# Altium PCB Rackmount_DSP.PcbDoc (part 19 of 24)
Units mil, origin at the board's own origin, x right, y up, seen from the top; angles counter-clockwise.
Board outline 10629.92 x 8267.72 mil, 4 copper layers (Top Layer, Mid Layer 1, Mid Layer 2, Bottom Layer), stack 36.2 mil thick; 4500 components, 1565 nets, 9765 pads, 3289 vias.
Unrouted connection lines stored in the file: 1.
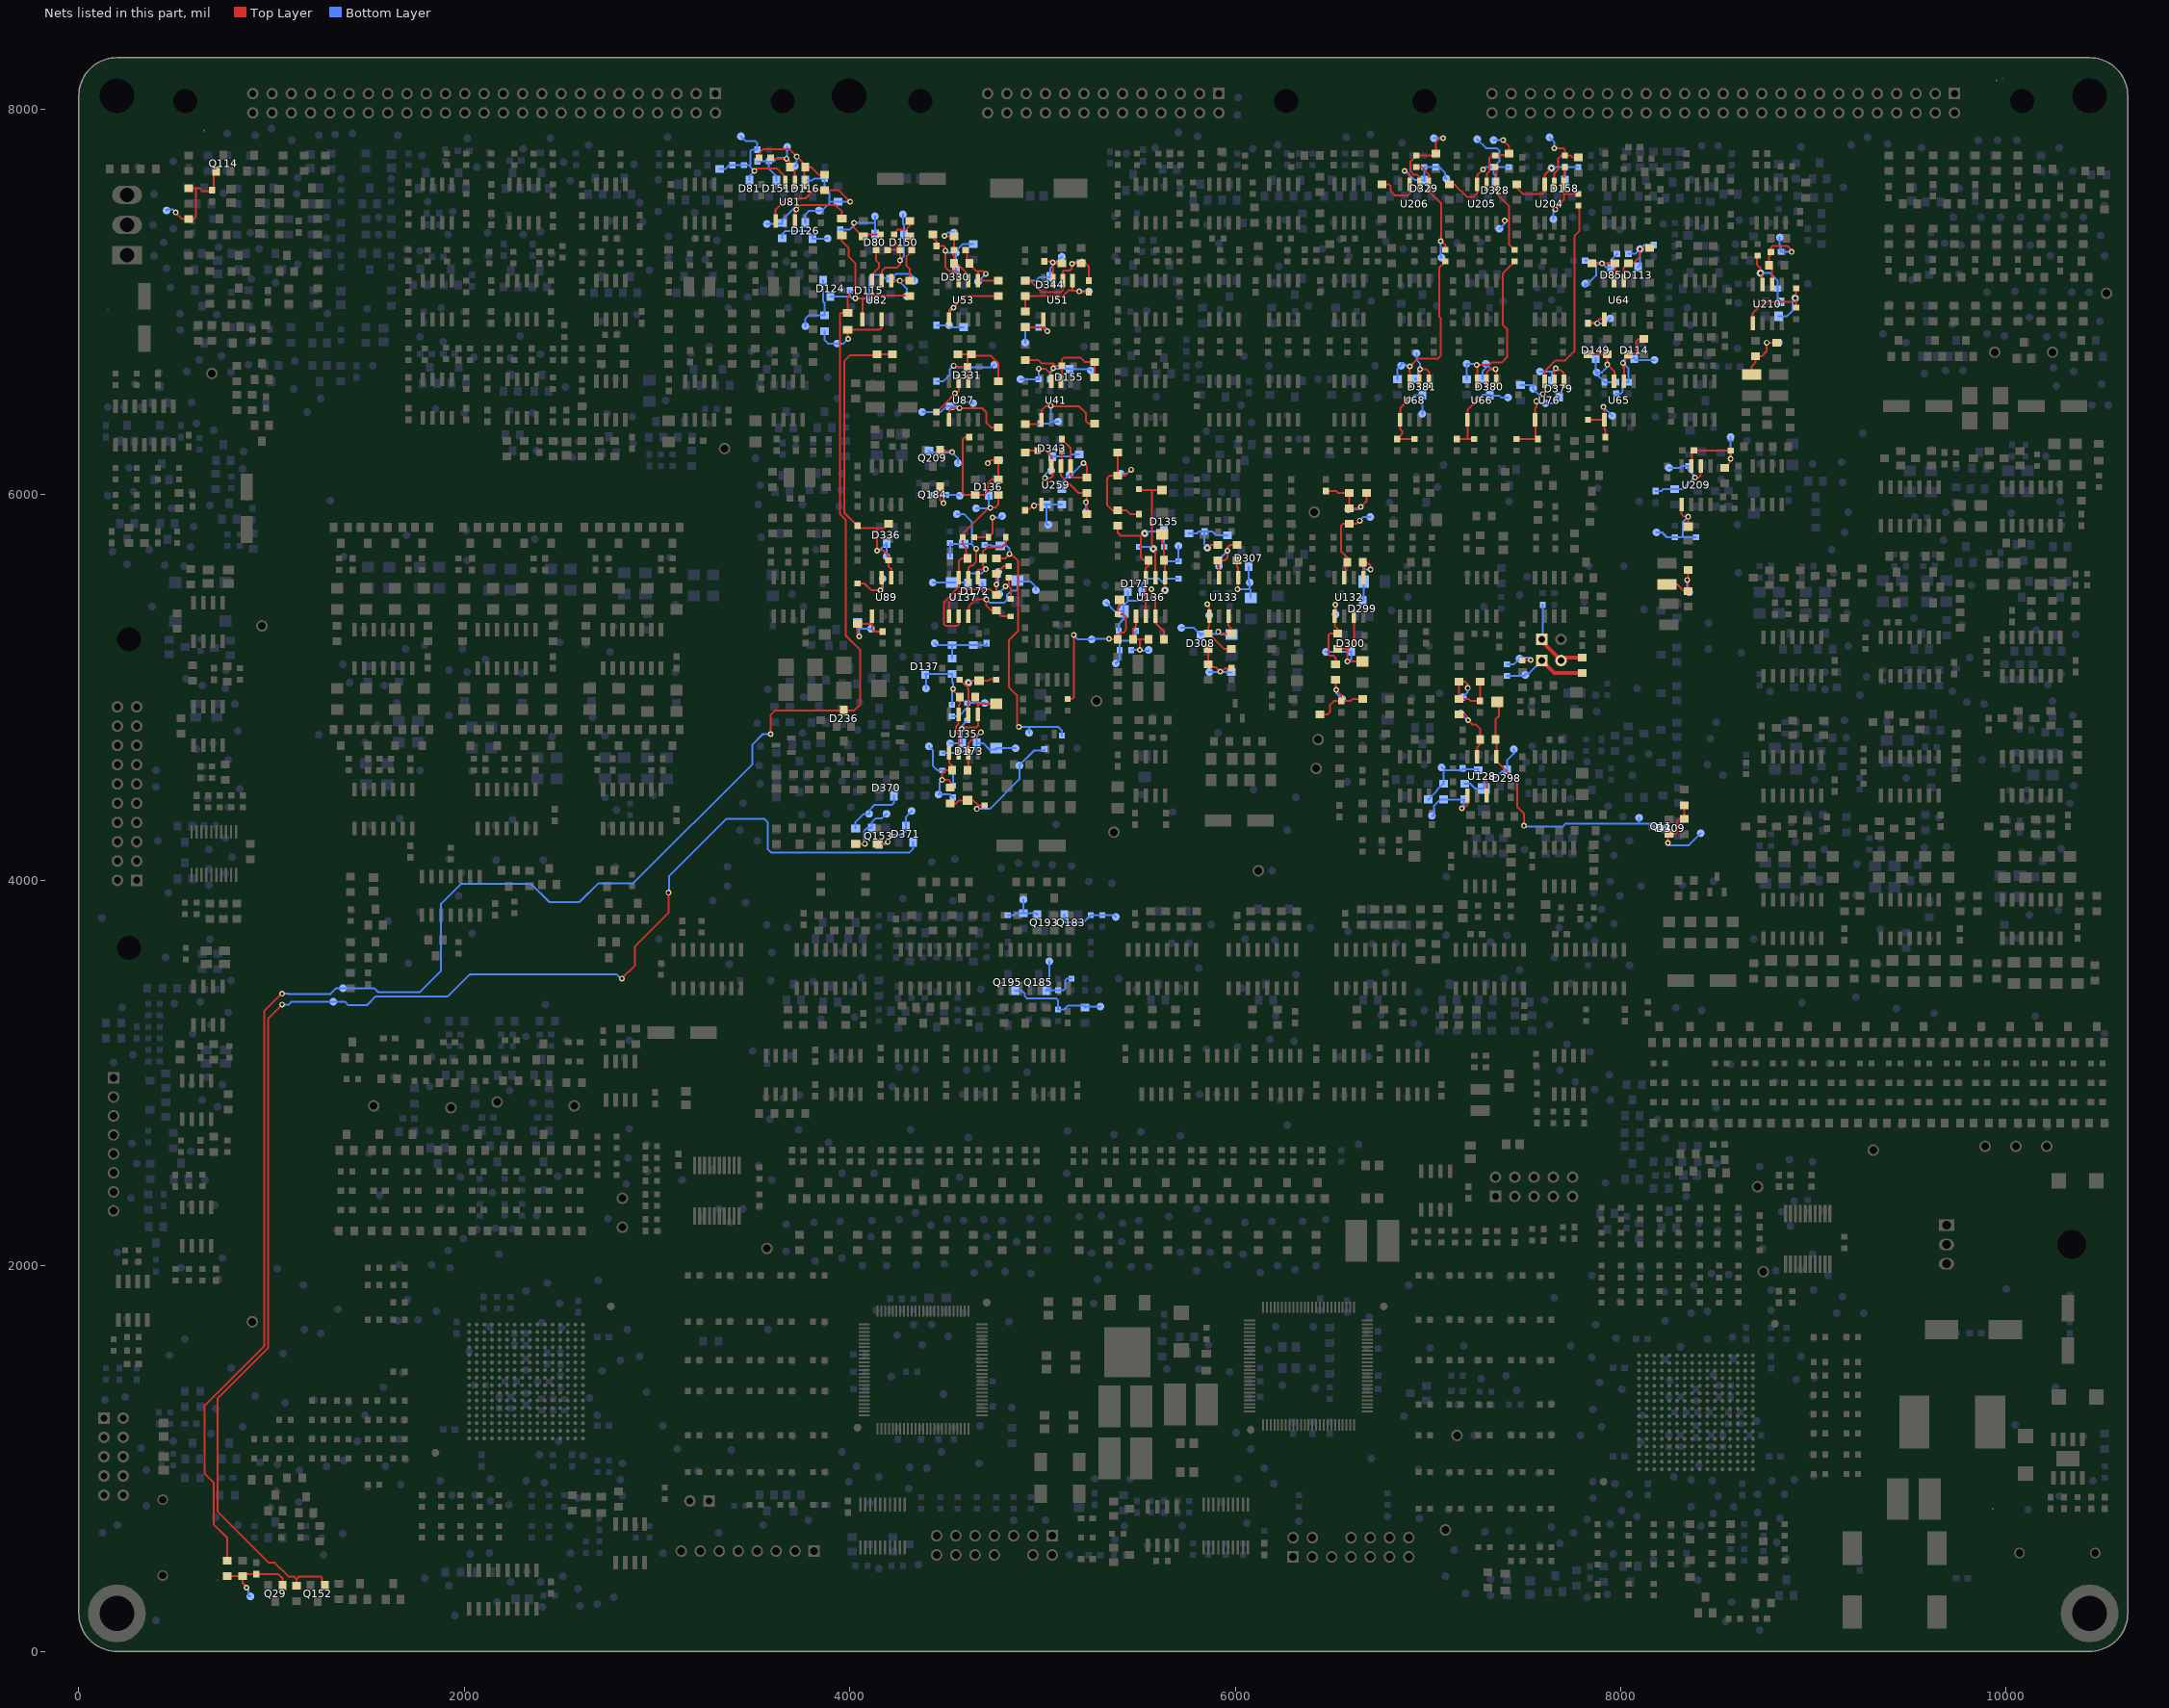
[diagram p21: the nets of this part, all layers, seen from the top]

## Via types
v1: diameter 30, hole 16, Top Layer to Bottom Layer, 3143 vias
v2: diameter 22, hole 12, Top Layer to Bottom Layer, 146 vias

## Nets (pads, with @x,y where several pads share a name; then routed paths per layer and width w, separated by ;. In a path a pad name is that pad's centre, name@x,y a point inside that pad or via, vN(x,y) a via of type N, cw(c..) or ccw(c..) an arc to the next point about the centre after c; other vN are vias at no path point) (continued)
XSIG150068: C1240.2 C1241.1 D113.3 R835.2 R1987.1 TP1053.1 U64.2 | length 522.2
  Top Layer w10: U64.2@8015,7110 8013.85,7110 8013.85,7176.35 8037.5,7200 R835.2@8040,7200 8064.08,7200 8097.9,7233.82 v1@8097.9,7276.98 ; v1(8100,7275) 8100,7276.98 v1@8097.9,7276.98 ; R1987.1@8150,7280 8100.92,7280 v1@8097.9,7276.98
  Bottom Layer w10: C1240.2@8040,7250 8075,7250 v1(8100,7275) ; D113.3@8090,7181.5 8100,7191.5 v1(8100,7275) ; C1241.1@8170,7295 8120,7295 v1(8100,7275)
XSIG150069: C1239.1 C1240.1 D85.3 R799.2 R1988.1 TP1054.1 U64.3 | length 602.7
  Top Layer w10: R1988.1@7850,7200 v1(7902.84,7200) R799.2@7970,7200 7970,7165 7965,7160 U64.3@7965,7110
  Bottom Layer w10: TP1054.1@7815,7095 7815,7084.75 7817.25,7082.5 7871.81,7137.06 7871.81,7206.78 ; C1239.1@7815,7215 7864.52,7215 7871.81,7207.72 7871.81,7206.78 ; C1240.1@7980,7250 7950,7220 D85.3@7950,7181.5 7921.34,7181.5 v1(7902.84,7200) 7878.59,7200 7871.81,7206.78
XSIG150090: C1243.2 C1244.1 D114.3 R836.2 R1989.1 TP1055.1 U65.2 | length 717.2
  Top Layer w10: U65.2@8015,6590 8016.31,6590 8016.31,6662.71 8011.45,6662.71 v1(8011.45,6684.01) 8036.85,6709.42 8036.85,6730 R836.2@8040,6730 8069.27,6730 8078.91,6739.64 8078.91,6796.1 8092.82,6810 R1989.1@8120,6810
  Bottom Layer w10: C1243.2@7975,6525 7999.89,6525 8009,6534.11 8009,6579.62 8014.38,6585 C1244.1@8040,6585 8040,6655.46 v1(8011.45,6684.01) 8013.08,6685.64 8013.08,6696.97 8024.61,6708.5 D114.3@8070,6708.5 8078.5,6700 TP1055.1@8175,6700
XSIG150091: C1242.1 C1243.1 D149.3 R851.2 R1990.1 TP1056.1 U65.3 | length 539.2
  Top Layer w10: R851.2@7830,6730 R1990.1@7930,6730 v1(7930,6675.52) 7966.07,6639.46 7966.07,6590 U65.3@7965,6590
  Bottom Layer w10: D149.3@7870,6708.5 7870,6635.84 7870.84,6635 TP1056.1@7875,6635 ; v1(7930,6675.52) 7930,6663.85 7901.15,6635 TP1056.1@7875,6635 ; C1243.1@7975,6585 C1242.1@7915,6585 7875,6625 TP1056.1@7875,6635
XSIG150115: D124.1 R1461.1 TP1058.1 | length 330.2
  Bottom Layer w10: TP1058.1@3770,6875 3770,6913.95 3786.05,6930 R1461.1@3870,6930 3870,6993.79 3862.5,7001.29 D124.1@3862.5,7111.5
XSIG150123: D126.1 R1438.1 TP1059.1 | length 290
  Bottom Layer w10: R1438.1@3650,7330 3650,7352.92 3664.13,7367.05 3785.38,7367.05 3807.5,7344.93 D126.1@3807.5,7328.5 3869.87,7328.5 3871.37,7330 TP1059.1@3885,7330
XSIG150127: D71.1 D72.1 D236.3 R1423.1 TP1615.1 | length 9755
  Top Layer w10: R1423.1@770,470 770,587.62 698.59,659.03 698.59,875.99 653.34,921.24 653.34,1275.95 961.11,1583.72 961.11,3321.3 1051.26,3411.44 v1(1053.72,3411.44) ; v1(3588.93,4758.36) 3588.93,4858.02 3612.41,4881.5 D236.3@3970,4881.5 4023.34,4881.5 4052.75,4910.91 4052.75,5196 3978.46,5270.29 3978.46,5870.7 3950,5899.17 3950,6939.41 3954.09,6943.5 D71.1@3990,6943.5 3990,7030.35 4030,7070.35 4030,7199.95 3992.93,7237.02 3992.93,7281.78 3960,7314.71 D72.1@3960,7346.5
  Bottom Layer w10: v1(1053.72,3411.44) 1083.72,3411.44 1084.43,3410.73 1305.73,3410.73 1335,3440 TP1615.1@1370,3440 1532.11,3440 1551.39,3420.72 1768.91,3420.72 1879.64,3531.45 1879.64,3879.14 1981.92,3981.41 2347.54,3981.41 2442.17,3886.78 2597.55,3886.78 2695.67,3984.89 2876.98,3984.89 3495,4602.92 3495,4704.5 3548.86,4758.36 v1(3588.93,4758.36)
XSIG150131: C377.2 Q29.1 R1359.2 R1423.2 TP1060.1 | length 470.9
  Top Layer w10: R1423.2@770,390 R1359.2@850,390 ; v1(869.42,329.92) 869.42,333.62 850,353.04 R1359.2@850,390 ; Q29.1@1057.5,341.5 1057.5,377.91 1035.41,400 C377.2@920,400 850,400 R1359.2@850,390
  Bottom Layer w10: v1(869.42,329.92) 879.34,320 879.34,285 TP1060.1@890,285
XSIG150140: C1247.2 R1491.1 R1669.2 TP1061.1 U82.1 | length 442.6
  Top Layer w10: U82.1@4215,7110 v1(4259.64,7110) R1491.1@4310,7110 4310,7172.75 4292.33,7190.42 4292.33,7233.94 4320,7261.61 C1247.2@4320,7270 4320,7330 R1669.2@4310,7340
  Bottom Layer w10: v1(4259.64,7110) 4259.64,7105.68 4295,7070.32 TP1061.1@4295,7030
XSIG150141: C1246.2 C1247.1 D150.3 R852.2 R1669.1 TP1062.1 U82.2 | length 772.6
  Top Layer w10: U82.2@4165,7110 4165,7160 4183.8,7178.8 4245.03,7178.8 4260.67,7194.44 4260.67,7215.38 v1(4260.01,7215.38) C1247.1@4260,7270 ; C1246.2@4195,7270 C1247.1@4260,7270 ; R1669.1@4310,7420 4310,7395.4 4290.02,7375.43 4246.72,7375.43 4231,7359.7 4231,7350 R852.2@4230,7350 4230,7314.48 4260,7284.48 C1247.1@4260,7270
  Bottom Layer w10: v1(4260.01,7215.38) 4260.01,7217.82 4280,7237.81 D150.3@4280,7351.5 4280,7402.5 4275,7407.5 TP1062.1@4275,7455
XSIG150143: C1245.1 C1246.1 D80.3 R794.2 R1670.1 TP1063.1 U82.3 | length 759
  Top Layer w10: v1(4022.5,7410.05) 4022.5,7385 4067.5,7340 R1670.1@4070,7340 4070,7351.1 4160,7351.1 R794.2@4160,7350 4160,7326.89 4135,7301.89 C1246.1@4135,7270 4135,7217.41 4149.98,7202.43 4149.98,7177.57 4132.41,7160 4131.78,7160 4115,7143.22 U82.3@4115,7110
  Bottom Layer w10: C1245.1@3950,7375 3997.58,7375 4022.5,7399.92 v1(4022.5,7410.05) 4129.43,7410.05 4130,7410.62 ; D80.3@4130,7351.5 4130,7410.62 ; TP1063.1@4130,7445 4130,7410.62
XSIG150153: C1250.2 R1490.1 R1671.2 TP1064.1 U81.1 | length 570.4
  Top Layer w10: C1250.2@3530,7750 3530,7772.69 3550.61,7793.3 3686.1,7793.3 v1(3725.22,7754.18) 3770,7709.4 R1671.2@3770,7700 ; U81.1@3765,7620 3765,7688.62 3770,7688.62 R1671.2@3770,7700 ; R1490.1@3870,7660 3839.45,7660 3799.45,7700 R1671.2@3770,7700
  Bottom Layer w10: TP1064.1@3715,7705 3725.22,7715.22 v1(3725.22,7754.18)
XSIG150162: D72.2 R1438.2 TP1065.1 U81.7 | length 557.6
  Top Layer w10: U81.7@3715,7420 3715,7475.33 3720.91,7481.24 v1(3722.5,7481.24) 3743.76,7502.5 3926,7502.5 3960,7468.5 D72.2@3960,7433.5
  Bottom Layer w10: TP1065.1@3570,7405 3650,7405 R1438.2@3650,7410 3650,7426.98 3704.26,7481.24 v1(3722.5,7481.24)
XSIG150166: C546.2 D116.3 D126.3 R1490.2 R1614.2 TP108.1 U81.5 | length 1055.4
  Top Layer w10: U81.5@3615,7420 3615,7479.62 3673.52,7538.15 3771.11,7538.15 3812.96,7580 R1490.2@3870,7580 3942.12,7580 v1(4002.12,7520)
  Bottom Layer w10: D126.3@3770,7411.5 3770,7455.09 3788.98,7474.07 3840,7474.07 TP108.1@3840,7475 3854.78,7475 3899.78,7520 ; D116.3@3770,7631.5 3805,7631.5 3813.5,7640 C546.2@3869.44,7640 ; C546.2@3870,7640 C546.2@3869.44,7640 ; v1(4002.12,7520) R1614.2@3940,7520 3899.78,7520 ; C546.2@3869.44,7640 3869.44,7591.27 3894.66,7566.06 3894.66,7520.01 3899.78,7520
XSIG150170: D71.2 R1461.2 TP1066.1 U82.7 | length 457.4
  Top Layer w10: D71.2@3990,6856.5 D71.2@3990,6855.87 ; v1(3991.34,6809.19) 3990,6810.53 D71.2@3990,6855.87 ; U82.7@4165,6910 4165,6866.33 4154.54,6855.87 D71.2@3990,6855.87
  Bottom Layer w10: R1461.2@3870,6850 3870,6801.69 3886.69,6785 TP1066.1@3935,6785 3967.14,6785 v1(3991.34,6809.19)
XSIG150171: C545.2 D115.3 D124.3 R1491.2 R1613.2 TP1067.1 U82.5 | length 1029.9
  Top Layer w10: v1(4029.37,7019.86) 4065,7019.86 ; U82.5@4065,6910 4065,7019.86 ; R1491.2@4310,7030 4310,7034.63 4102.83,7034.63 4088.76,7020.56 4065,7020.56 4065,7019.86
  Bottom Layer w10: D124.3@3900,7028.5 4000,7028.5 ; C545.2@4000,7060 4000,7028.5 ; D115.3@4100,7018.5 D115.3@4100,7019.86 ; TP1067.1@4335,7110 4335,7125 4315,7145 4237.5,7145 4212.5,7120 R1613.2@4210,7120 4184.09,7120 4162.43,7141.67 4112.95,7141.67 4100,7128.71 D115.3@4100,7019.86 ; 4000,7028.5 4001.83,7028.5 4010.47,7019.86 v1(4029.37,7019.86) D115.3@4100,7019.86
XSIG150178: C1248.1 C1249.1 D81.3 R795.2 R1672.1 TP1068.1 U81.3 | length 723.5
  Top Layer w10: v1(3505.39,7680.25) 3518.71,7693.57 3620.91,7693.57 3665,7649.48 U81.3@3665,7620
  Bottom Layer w10: R1672.1@3325,7690 3352.45,7690 3372.45,7710 C1248.1@3390,7710 R795.2@3450,7710 3480.81,7710 ; TP1068.1@3435,7860 3460.68,7834.32 3509.7,7834.32 3520,7824.02 C1249.1@3520,7790 3490.62,7790 3485.4,7784.79 3485.4,7714.6 3480.81,7710 ; D81.3@3480,7631.5 3480,7654.86 v1(3505.39,7680.25) 3480.81,7704.83 3480.81,7710
XSIG150180: C1249.2 C1250.1 D151.3 R853.2 R1671.1 TP1069.1 U81.2 | length 566.8
  Top Layer w10: C1250.1@3590,7750 3596.33,7743.67 v1(3671.14,7743.67) 3671.14,7744.97 3689.94,7726.16 3689.94,7700.06 R1671.1@3690,7700 3715,7675 U81.2@3715,7620
  Bottom Layer w10: C1249.2@3520,7730 R853.2@3580,7730 ; D151.3@3620,7631.5 3620,7651.55 3580,7691.55 R853.2@3580,7730 ; TP1069.1@3675,7805 3675,7747.53 v1(3671.14,7743.67) 3666.6,7748.21 3624.68,7748.21 3606.47,7730 R853.2@3580,7730
XSIG150219: C375.2 R1537.2 TP1070.1 U64.5 | length 224.3
  Top Layer w10: R1537.2@7830,6890 v1(7878.09,6889.98) ; v1(7878.09,6889.98) 7878.09,6899.59 7888.5,6910 U64.5@7915,6910
  Bottom Layer w10: C375.2@7830,6890 v1(7878.09,6889.98) ; v1(7878.09,6889.98) 7919.98,6889.98 TP1070.1@7945,6915
XSIG150227: C376.2 R1538.2 TP1071.1 U65.5 | length 309.3
  Top Layer w10: R1538.2@7830,6390 U65.5@7915,6390 ; v1(7909.47,6455.53) 7915,6450 U65.5@7915,6390 ; C376.2@7920,6300 7920,6335 7915,6340 U65.5@7915,6390
  Bottom Layer w10: v1(7909.47,6455.53) TP1071.1@7955,6410
XSIG150243: J16.1 R2520.1 R2736.2 TP1685.1 | length 458.1
  Top Layer w20: J16.1@7590,5140 7655,5075 R2520.1@7800,5075
  Bottom Layer w10: R2736.2@7410,5060 7500.81,5060 7500.81,5065 TP1685.1@7505,5065 7505,5073.64 7523.64,5073.64 J16.1@7590,5140
XSIG150244: J16.2 J17.1 R2379.1 R2520.2 TP1686.1 TP1883.1 | length 449.7
  Top Layer w20: J17.1@7590,5250 7590,5240 J16.2@7690,5140 7705,5155 R2520.2@7800,5155
  Bottom Layer w10: TP1883.1@7590,5250 7595,5255 R2379.1@7595,5430
XSIG150246: R2521.2 R2736.1 TP1882.1 | length 188.6
  Top Layer w10: R2521.2@7490,5140 7529.17,5140 v1(7532.75,5143.58)
  Bottom Layer w10: R2736.1@7410,5120 7445,5120 TP1882.1@7475,5150 7475,5154.61 7521.72,5154.61 v1(7532.75,5143.58)
XSIG150275: Q11.1 R1355.2 R1448.1 TP1057.1 | length 476.9
  Top Layer w10: v1(8244.41,4194.31) 8244.41,4207.25 8244.66,4207.5 8244.66,4242.5 Q11.1@8251.5,4242.5 8283.5,4242.5 8290.99,4249.99 8290.99,4305.89 8305.1,4320 R1355.2@8330,4320 R1448.1@8330,4390
  Bottom Layer w10: v1(8244.41,4194.31) 8244.41,4182.38 8352.38,4182.38 TP1057.1@8415,4245
XSIG160133: C1060.2 R2302.1 R2303.2 TP1072.1 U51.5 | length 378.4
  Top Layer w10: R2303.2@4910,6870 5004.83,6870 5005,6870.17 ; U51.5@5005,6910 5005,6870.17 ; v1(5024.23,6848.81) 5024.23,6847.52 5017.48,6847.52 5005,6860 5005,6870.17
  Bottom Layer w10: TP1072.1@4910,6790 R2302.1@4910,6870 C1060.2@4980,6870 5011,6870 5024.23,6856.77 v1(5024.23,6848.81)
XSIG160141: C1085.2 R2303.1 R2380.2 TP1073.1 U51.1 | length 527
  Top Layer w10: R2303.1@4910,6950 R2380.2@4910,7030 5104.61,7030 5134.61,7060 5155,7060 ; U51.1@5155,7110 5155,7060 ; C1085.2@5240,7050 5194.55,7050 v1(5189.55,7055) 5186.41,7058.14 5156.86,7058.14 5155,7060
  Bottom Layer w10: v1(5189.55,7055) TP1073.1@5240,7055
XSIG160144: C1045.2 D344.3 R2266.2 R2601.1 TP1074.1 U51.3 | length 475.2
  Top Layer w10: C1045.2@5010,7210 5041,7210 5044.47,7206.53 v1(5052.11,7206.53) ; U51.3@5055,7110 5055,7176.07 5052.11,7178.96 v1(5052.11,7206.53) ; R2266.2@5100,7200 5058.64,7200 v1(5052.11,7206.53)
  Bottom Layer w10: R2601.1@4910,7110 4964.02,7110 4981.62,7127.6 5040,7127.6 D344.3@5040,7131.5 5040,7135 5041.29,7136.29 5041.29,7176.29 v1@5061.82,7196.82 ; v1(5052.11,7206.53) v1@5061.82,7196.82 ; TP1074.1@5100,7235 v1@5061.82,7196.82
XSIG160146: C1085.1 R2304.2 R2380.1 TP1075.1 U51.2 | length 627.4
  Top Layer w10: R2380.1@4910,7110 4937.25,7110 4997.19,7050.05 5094.17,7050.05 5105,7060.89 U51.2@5105,7110 5105,7157.68 5110.8,7163.48 5141.57,7163.48 5152.48,7174.39 v1(5152.48,7198.69) 5153.78,7200 R2304.2@5200,7200 5224.07,7200 5240,7184.07 C1085.1@5240,7110
  Bottom Layer w10: v1(5152.48,7198.69) 5152.48,7205 TP1075.1@5205,7205
XSIG160161: C1059.2 R2310.2 R2312.1 TP1076.1 U259.5 | length 365.3
  Top Layer w10: C1059.2@4910,5920 4926.38,5920 v1@4956.38,5950 ; v1(4956.38,5943.47) v1@4956.38,5950 ; U259.5@4995,5950 v1@4956.38,5950
  Bottom Layer w10: v1(4956.38,5943.47) 4962.92,5950 R2312.1@5020,5950 ; TP1076.1@5030,5845 5020,5845 R2312.1@5020,5950 ; R2310.2@5100,5950 R2312.1@5020,5950
XSIG160169: C1086.2 R2310.1 R2381.2 TP107.1 U259.1 | length 577.8
  Top Layer w10: C1086.2@5100,6290 5100,6288.5 5145,6243.5 U259.1@5145,6150 5145,6100 5155,6090 R2381.2@5230,6090 5230,6150.55 5213.05,6167.5 v1(5213.05,6165)
  Bottom Layer w10: R2310.1@5100,6030 5100,6065 TP107.1@5140,6105 5150.55,6105 5213.05,6167.5 v1(5213.05,6165)
XSIG160171: C1046.2 D343.3 R2267.2 R2597.1 TP1077.1 U259.3 | length 586.9
  Top Layer w10: R2267.2@4910,6220 4920,6230 C1046.2@4975,6230 5015,6230 5045,6200 U259.3@5045,6150 5051.5,6150 5051.5,6095.53 5043.3,6087.33 v1(5011.83,6087.33)
  Bottom Layer w10: v1(5011.83,6087.33) 5011.83,6103.16 5033.67,6125 TP1077.1@5045,6125 5050,6125 D343.3@5050,6198.5 5141,6198.5 5152.5,6210 R2597.1@5190,6210
XSIG160172: C1086.1 R2311.2 R2381.1 TP1078.1 U259.2 | length 470.8
  Top Layer w10: C1086.1@5100,6230 5100,6155 U259.2@5095,6150 5095,6100 5185,6010 R2381.1@5230,6010 v1@5230,5961.45 ; v1(5225,5961.45) v1@5230,5961.45 ; R2311.2@5230,5900 v1@5230,5961.45
  Bottom Layer w10: TP1078.1@5225,5910 v1(5225,5961.45)
XSIG160213: C1061.2 R2306.2 R2307.1 TP1079.1 U53.5 | length 578.1
  Top Layer w10: U53.5@4515,6910 4515,6960 4525.62,6970.62 v1(4537.68,6970.62) 4597.06,7030 R2306.2@4770,7030
  Bottom Layer w10: C1061.2@4450,6880 TP1079.1@4515,6880 ; v1(4537.68,6970.62) 4515,6947.94 TP1079.1@4515,6880 ; R2307.1@4590,6870 4525,6870 TP1079.1@4515,6880
XSIG160220: C1087.2 R2306.1 R2382.2 TP1080.1 U53.1 | length 413.4
  Top Layer w10: C1087.2@4600,7270 4608.88,7270 4608.88,7200 R2382.2@4620,7200 4620,7197.5 4657.5,7160 4665,7160 ; v1(4705.9,7147.21) 4703.64,7147.21 4690.86,7160 4665,7160 ; R2306.1@4770,7110 U53.1@4665,7110 4665,7160
  Bottom Layer w10: TP1080.1@4665,7105 4665,7105.51 4705.9,7146.41 v1(4705.9,7147.21)
XSIG160222: C1044.2 D330.3 R2265.2 R2598.1 TP1081.1 U53.3 | length 607.8
  Top Layer w10: R2265.2@4430,7360 R2265.2@4430,7350 4430,7334.79 4450.74,7314.06 C1044.2@4450.74,7290 ; C1044.2@4450,7290 C1044.2@4450.74,7290 ; U53.3@4565,7110 4565,7148.79 4553.79,7160 4516.29,7160 4495.98,7180.31 v1(4495.98,7267.02) 4495.98,7282.39 4488.37,7290 C1044.2@4450.74,7290
  Bottom Layer w10: v1(4495.98,7267.02) 4508.01,7255 TP1081.1@4550,7255 ; D330.3@4550,7171.5 TP1081.1@4550,7255 ; R2598.1@4640,7300 4584.7,7300 4550,7265.3 TP1081.1@4550,7255
XSIG160224: C1087.1 R2305.2 R2382.1 TP1082.1 U53.2 | length 378.1
  Top Layer w10: v1(4490.42,7342.92) 4493.34,7340 R2305.2@4540,7340 C1087.1@4540,7270 R2382.1@4540,7200 4556.29,7200 4615,7141.29 U53.2@4615,7110
  Bottom Layer w10: v1(4490.42,7342.92) 4507.49,7360 TP1082.1@4540,7360
XSIG160235: C1031.1 Q114.1 R2224.1 R2225.2 TP1083.1 | length 570
  Top Layer w10: v1(502.17,7464.91) 537.07,7430 R2224.1@570,7430 593.65,7430 607.5,7443.85 607.5,7590 ; R2225.2@570,7590 607.5,7590 ; Q114.1@712.5,7678.5 712.5,7675 700.29,7662.79 700.29,7580 C1031.1@690,7580 690,7576.72 641.53,7576.72 628.25,7590 607.5,7590
  Bottom Layer w10: TP1083.1@455,7475 455,7476.18 458.26,7479.43 487.64,7479.43 v1(502.17,7464.91)
XSIG160247: D370.1 R2221.2 TP101.1 | length 321.2
  Bottom Layer w10: R2221.2@4030,4270 4028.15,4270 4028.15,4299.94 4073.21,4345 TP101.1@4100,4345 4100,4363.33 4128.63,4391.96 4218.44,4391.96 4227.5,4401.02 D370.1@4227.5,4438.5
XSIG160248: Q153.1 R2220.2 R2221.1 TP1084.1 | length 331.6
  Top Layer w10: R2220.2@4030,4190 v1(4077.87,4190)
  Bottom Layer w10: R2221.1@4030,4190 v1@4073.49,4190 ; v1(4077.87,4190) v1@4073.49,4190 ; TP1084.1@4190,4345 4165.25,4320.25 4133.24,4320.25 4112.5,4299.51 Q153.1@4112.5,4271.5 4088.91,4271.5 4073.49,4256.08 v1@4073.49,4190
XSIG160249: D371.1 Q152.1 R2222.2 TP1616.1 | length 7625.4
  Top Layer w10: v1(1055.03,3355.82) 981.11,3281.9 981.11,1573.13 719.36,1311.38 719.36,727.01 986.37,460 1015.75,460 1087.51,388.24 1116.76,388.24 1130,375 ; R2222.2@1130,340 1130,375 ; Q152.1@1277.5,341.5 1262.5,341.5 1262.5,380 1254.26,388.24 1143.24,388.24 1130,375 ; v1(2817.13,3490.52) 2885.68,3559.07 2885.68,3657.81 3060.2,3832.32 3060.2,3916.52 3058.85,3916.52 v1(3058.85,3935.76)
  Bottom Layer w10: v1(1055.03,3355.82) 1089.74,3355.82 1103.93,3370 TP1616.1@1320,3370 1379.13,3370 1397.57,3351.56 1493.99,3351.56 1540.27,3397.84 1913.82,3397.84 2025.37,3509.38 2029.73,3509.38 2031.97,3511.62 2791.23,3511.62 2812.33,3490.52 v1(2817.13,3490.52) ; v1(3058.85,3935.76) 3061.54,3935.76 3061.54,4019.69 3361.66,4319.81 3555.27,4319.81 3575,4300.08 3575,4161.29 3591.29,4145 4309.1,4145 4327.5,4163.4 D371.1@4327.5,4198.5
XSIG160250: D371.3 Q153.3 R2223.2 TP1085.1 | length 352.8
  Top Layer w10: R2223.2@4140,4190 4187.83,4190 v1(4197.12,4199.29)
  Bottom Layer w10: Q153.3@4150,4188.5 4185,4188.5 4195.79,4199.29 v1(4197.12,4199.29) 4197.12,4207.83 4226.29,4237 4275.13,4237 4290,4251.87 D371.3@4290,4281.5 4290,4327.26 4320,4357.26 TP1085.1@4320,4360
XSIG160271: Q195.1 R2591.1 R2615.1 TP1687.1 | length 540.3
  Bottom Layer w10: Q195.1@4857.5,3428.5 4892.5,3428.5 4907.5,3413.5 4907.5,3398.79 4918.79,3387.5 5070.32,3387.5 5080,3377.82 R2591.1@5080,3330 5111,3330 5131,3350 5220,3350 R2615.1@5220,3340 5225,3345 TP1687.1@5300,3345
XSIG160273: Q185.1 R2577.2 R2624.2 TP1688.1 | length 339.2
  Bottom Layer w10: Q185.1@5017.5,3428.5 Q185.1@5019,3430 ; TP1688.1@5035,3580 5035,3446 Q185.1@5019,3430 ; R2577.2@5150,3490 5127.16,3490 5118.32,3481.16 5118.32,3439.19 5109.13,3430 R2624.2@5080,3430 Q185.1@5019,3430
XSIG160278: Q193.1 R2589.1 R2616.1 TP1689.1 | length 231.9
  Bottom Layer w10: R2589.1@4820,3820 4851,3820 4861,3830 R2616.1@4900,3830 ; TP1689.1@4900,3900 R2616.1@4900,3830 ; Q193.1@4972.5,3821.5 4972.5,3824.5 4967,3830 R2616.1@4900,3830
XSIG160280: Q183.1 R2578.2 R2625.2 TP1690.1 | length 323.8
  Bottom Layer w10: Q183.1@5112.5,3821.5 5112.5,3786.54 5116.04,3783 5213.71,3783 5250,3819.29 R2578.2@5250,3820 R2625.2@5310,3820 5370,3820 TP1690.1@5380,3810
XSIG160287: Q184.1 R2579.2 R2626.2 TP1692.1 | length 280.3
  Top Layer w10: Q184.1@4467.5,6041.5 4467.5,5974.2 v1(4485.59,5956.11)
  Bottom Layer w10: R2579.2@4430,6000 R2626.2@4489,6000 ; v1(4485.59,5956.11) 4485.59,5966.59 4489,5970 R2626.2@4489,6000 ; TP1692.1@4570,5995 4565,6000 R2626.2@4500,6000 R2626.2@4489,6000
XSIG160319: Q209.1 R2583.1 R2617.1 TP1691.1 | length 270.2
  Top Layer w10: Q209.1@4467.5,6231.5 4467.5,6226.88 4518.03,6226.88 4524.13,6220.78 v1(4530.56,6220.78)
  Bottom Layer w10: R2617.1@4410,6230 4420,6220 R2583.1@4480,6220 4521.24,6220 4523.23,6218.01 4524.02,6218.01 4530.56,6224.55 v1(4530.56,6220.78) 4560,6191.34 TP1691.1@4560,6165
XSIG170051: C384.2 R1701.2 R1728.1 TP1086.1 U41.5 | length 679.8
  Top Layer w10: R1728.1@4910,6367 4912.5,6367 4990.04,6367 4995,6371.96 U41.5@4995,6390 4995,6438.69 5018.57,6462.26 v1(5042.72,6462.26) 5044.98,6460 5187.72,6460 5225.57,6422.15 5225.57,6380.92 5236.49,6370 R1701.2@5270,6370
  Bottom Layer w10: C384.2@4990,6370 5035.3,6370 5042.72,6377.42 5042.72,6377.72 ; v1(5042.72,6462.26) 5042.72,6377.72 ; TP1086.1@5080,6380 5045,6380 5042.72,6377.72
XSIG170145: C1049.1 C1058.2 D155.3 R2308.2 R2309.2 R2371.1 TP1087.1 U41.2 | length 868.8
  Top Layer w10: R2308.2@4910,6700 4977.46,6700 4996.78,6680.68 5055.4,6680.68 ; v1(5055.17,6656.7) 5055.4,6656.93 5055.4,6680.68 ; U41.2@5095,6590 5100,6595 C1049.1@5100,6670 ; R2371.1@5270,6610 R2309.2@5270,6690 5218.42,6690 5196.55,6711.87 5110.72,6711.87 5100,6701.15 C1049.1@5100,6670 ; 5055.4,6680.68 5066.08,6670 C1049.1@5100,6670
  Bottom Layer w10: C1058.2@5040,6600 5040,6633.89 5055.4,6649.29 v1@5055.4,6652.8 ; v1(5055.17,6656.7) 5055.17,6655.1 5055.4,6654.87 v1@5055.4,6652.8 ; TP1087.1@5250,6645 5250,6651.5 D155.3@5140,6651.5 5140,6652.8 v1@5055.4,6652.8
XSIG170193: R1256.2 R1615.1 R3003.1 TP1090.1 U136.5 | length 360.6
  Top Layer w10: U136.5@5485,5370 5485,5320 5470,5305 R1256.2@5470,5250 5502.49,5250 ; v1(5504.87,5195) 5504.87,5247.62 5502.49,5250 ; R1615.1@5550,5250 5502.49,5250
  Bottom Layer w10: R3003.1@5460,5195 v1(5504.87,5195) 5504.87,5190.81 5550,5190.81 TP1090.1@5550,5195
XSIG170197: D171.1 D400.2 R1428.1 R1616.2 TP98.1 U136.1 | length 602.6
  Top Layer w10: R1428.1@5620,5795 5620,5752.5 5630,5742.5 R1616.2@5630,5660 5635,5660 U136.1@5635,5570 v1(5635,5505)
  Bottom Layer w10: D171.1@5517.5,5498.5 5517.5,5541.51 5540.47,5564.48 5604.02,5564.48 5620.06,5548.45 ; v1(5635,5505) 5634.5,5505 5634.5,5534 5620.06,5548.45 ; D400.2@5705,5565 5636.61,5565 5620.06,5548.45
XSIG170199: D171.2 D401.2 R1427.2 R1615.2 TP1091.1 U136.7 | length 792.5
  Top Layer w10: v1(5565,5510) 5565,5480 5585,5460 U136.7@5585,5370 5585,5335.24 5630,5290.24 R1615.2@5630,5250
  Bottom Layer w10: TP1091.1@5330,5440 5330.92,5440.92 5376.85,5395 R1427.2@5420,5395 ; D401.2@5395,5295 5395,5330.18 5420,5355.18 R1427.2@5420,5395 ; D171.2@5442.5,5498.5 5442.5,5450.98 ; v1(5565,5510) 5565,5465.46 5550.51,5450.98 5442.5,5450.98 ; R1427.2@5420,5395 5420,5427.16 5442.5,5449.66 5442.5,5450.98
XSIG170211: D135.3 R1276.2 R1616.1 R3000.1 TP97.1 U136.3 U136.6 | length 840.6
  Top Layer w10: R1276.2@5390,5840 5390,5804.46 5407.1,5787.36 5510.57,5787.36 ; v1(5530,5800) 5530,5799.03 5522.23,5799.03 5510.57,5787.36 ; U136.6@5535,5370 U136.3@5535,5570 5535,5620 5550,5635 R1616.1@5550,5660 5525.77,5660 5510.57,5675.2 5510.57,5787.36
  Bottom Layer w10: v1(5530,5800) 5530,5799.03 5538.43,5799.03 5538.43,5800 5542.95,5800 5551.62,5808.67 5620.17,5808.67 D135.3@5630,5818.5 R3000.1@5630,5730
XSIG170226: R2375.2 TP1095.1 U41.3 | length 262.1
  Top Layer w10: v1(4980,6655.03) 5014.41,6655.03 5045,6624.45 U41.3@5045,6590
  Bottom Layer w10: TP1095.1@4885,6600 R2375.2@4980,6600 v1(4980,6655.03)
XSIG170274: C761.2 R1398.1 R1449.2 TP1096.1 | length 308.8
  Top Layer w10: C761.2@8240,5535 8292.35,5535 8327.35,5500 R1398.1@8350,5500 v1@8350,5558.82 ; v1(8344.46,5558.82) v1@8350,5558.82 ; R1449.2@8350,5610 v1@8350,5558.82
  Bottom Layer w10: v1(8344.46,5558.82) 8345.41,5558.82 8345.41,5504.59 TP1096.1@8355,5495
XSIG170278: C762.2 R1399.1 R1450.2 TP1097.1 | length 331.2
  Top Layer w10: C762.2@8680,6625 8680,6667.5 8700,6687.5 R1450.2@8700,6720 8731.73,6720 8756.56,6744.83 8756.56,6790 v1(8757.55,6790) R1399.1@8810,6790
  Bottom Layer w10: v1(8757.55,6790) TP1097.1@8820,6790
XSIG170286: C349.2 R2229.1 R2230.2 TP1098.1 U209.2 | length 498.5
  Top Layer w10: v1(8385.56,6090) 8405,6090 8415,6100 U209.2@8415,6150
  Bottom Layer w10: C349.2@8180,6020 8211,6020 8221,6030 R2229.1@8280,6030 8324.35,6030 v1@8384.35,6090 ; TP1098.1@8250,6140 8309,6140 8319,6150 R2230.2@8350,6150 8350,6129.15 8386.75,6092.4 v1@8384.35,6090 ; v1(8385.56,6090) v1@8384.35,6090
XSIG170290: C799.1 R2273.2 R2378.1 TP1099.1 U210.5 | length 565.5
  Top Layer w10: U210.5@8685,6890 8685,6941.93 8743.06,6999.99 8884.13,6999.99 v1@8905.62,7021.48 ; v1(8905,7020) 8905.62,7020 v1@8905.62,7021.48 ; R2378.1@8910,6970 8910,7017.1 v1@8905.62,7021.48 ; R2273.2@8910,7070 8910,7025.86 v1@8905.62,7021.48
  Bottom Layer w10: C799.1@8820,6925 8861.07,6925 8891.18,6955.11 8891.18,7006.18 v1(8905,7020)
XSIG170299: C402.1 R2271.2 R2599.1 TP1100.1 U209.3 | length 497.3
  Top Layer w10: U209.3@8365,6150 8370.09,6155.09 8370.09,6230 C402.1@8380,6230 R2271.2@8570,6230 v1(8570,6187.16) 8570,6173.71 8540,6143.71 R2599.1@8540,6140
  Bottom Layer w10: v1(8570,6187.16) TP1100.1@8570,6300
XSIG170305: C350.2 R2274.2 R2275.1 TP1101.1 U210.2 | length 473.3
  Top Layer w10: U210.2@8785,7090 8785,7190 R2275.1@8770,7190 8770,7237.67 8780,7247.67 C350.2@8780,7260 8780,7282.93 8788.07,7291 8863.71,7291 8886.64,7268.07 v1(8886.64,7260)
  Bottom Layer w10: TP1101.1@8825,7335 8825,7297.5 8830,7292.5 R2274.2@8830,7260 v1(8886.64,7260)
XSIG170309: C403.1 R2264.2 R2600.1 TP1102.1 U210.3 | length 395.2
  Top Layer w10: R2264.2@8710,7240 8706.06,7240 8706.06,7194.62 8724.8,7175.87 8724.8,7150.16 8725,7150.16 v1(8725,7150) 8725.68,7150 8725.68,7150.16 8735,7150.16 U210.3@8735,7090
  Bottom Layer w10: v1(8725,7150) 8725,7150.16 8774.77,7150.16 8815,7109.93 C403.1@8815,7070 8815,7015 R2600.1@8830,7000
XSIG170322: C798.1 R2272.2 R2377.1 TP104.1 U209.5 | length 475.8
  Top Layer w10: U209.5@8315,5950 8315,5900 8328.92,5886.08 v1(8350,5886.08) C798.1@8350,5835
  Bottom Layer w10: TP104.1@8185,5805 8214.46,5805 8239.46,5780 R2272.2@8280,5780 8312.75,5780 8319.82,5787.07 ; v1(8350,5886.08) 8321.93,5858.01 8321.93,5787.07 8319.82,5787.07 ; R2377.1@8390,5780 8326.89,5780 8319.82,5787.07
XSIG170328: C809.1 R1774.1 R2054.2 TP1089.1 U136.2 | length 686
  Top Layer w10: R1774.1@5500,6030 5500,6025 5568.43,6025 ; v1(5575,5720) v1@5574.69,5720 ; U136.2@5585,5570 5585,5715.04 5574.69,5715.04 v1@5574.69,5720 ; C809.1@5620,6025 5568.43,6025 ; 5568.43,6025 5568.43,5720 v1@5574.69,5720
  Bottom Layer w10: R2054.2@5500,5730 5561.36,5730 5574.69,5716.68 TP1089.1@5575,5716.68 ; TP1089.1@5574.69,5715.04 TP1089.1@5575,5715.04 ; v1(5575,5720) TP1089.1@5575,5716.68 ; TP1089.1@5578.36,5715.04 TP1089.1@5575,5715.04 ; TP1089.1@5575,5715.04 TP1089.1@5575,5716.68
XSIG170338: C509.1 R1193.2 R1276.1 R1694.2 TP1088.1 | length 650.8
  Top Layer w10: R1193.2@5390,6220 R1694.2@5390,6100 ; v1(5460,6130.43) 5429.57,6100 R1694.2@5390,6100 ; C509.1@5500,5900 5453.95,5900 5433.95,5920 R1276.1@5390,5920 5361.41,5920 5335.12,5946.28 5335.12,6086.48 5348.64,6100 R1694.2@5390,6100
  Bottom Layer w10: TP1088.1@5405,6110 5439.57,6110 v1(5460,6130.43)
XSIG170340: C806.1 R1256.1 R1777.1 R1812.2 TP99.1 | length 876.7
  Top Layer w10: R1812.2@5130,4940 5152.28,4940 5162.88,4950.59 5162.88,5272.94 v1(5161.5,5272.94) ; v1(5344.73,5253.01) 5347.75,5250 R1256.1@5390,5250 5390,5270.25 5404.92,5285.17 5420.01,5285.17 5433.39,5298.54 5433.39,5367.49 5420.87,5380 R1777.1@5390,5380 5390,5410 5397.5,5417.5 5400,5417.5 C806.1@5400,5455
  Bottom Layer w10: v1(5161.5,5272.94) 5184.44,5250 TP99.1@5255,5250 5255,5253.01 v1(5344.73,5253.01)
XSIG170348: D400.1 R3000.2 TP1913.1 | length 161.2
  Bottom Layer w10: R3000.2@5630,5670 5645,5655 D400.1@5705,5655 TP1913.1@5705,5735
XSIG170351: D401.1 R3003.2 TP1914.1 | length 252.3
  Bottom Layer w10: TP1914.1@5380,5125 5400,5145 R3003.2@5400,5195 5400,5232.64 5411.13,5243.77 5472.76,5243.77 5480.42,5251.43 5480.42,5283.79 5488.31,5291.69 D401.1@5485,5295
XSIG180229: R1257.2 R1617.1 R3004.1 TP1105.1 U137.5 | length 618.2
  Top Layer w10: U137.5@4515,5370 4515,5441.35 4584.26,5510.61 4726.89,5510.61 4757.5,5480 R1617.1@4760,5480 v1(4760,5535.19) R1257.2@4760,5590 4800,5630 R3004.1@4825,5630
  Bottom Layer w10: v1(4760,5535.19) 4770,5545.19 TP1105.1@4770,5600
XSIG180233: D172.1 D402.2 R1430.1 R1618.2 TP1107.1 U137.1 | length 685.3
  Top Layer w10: U137.1@4665,5570 4665,5610.21 4668.55,5613.77 4706.31,5613.77 v1(4706.31,5614.18) 4690,5630.49 R1618.2@4690,5670 4690,5706.34 4711.03,5727.37 4789.57,5727.37 4810,5747.8 D402.2@4810,5780
  Bottom Layer w10: TP1107.1@4430,5545 R1430.1@4530,5545 D172.1@4612.5,5545 ; D172.1@4612.5,5541.5 D172.1@4612.5,5545 ; v1(4706.31,5614.18) 4685.1,5592.96 4617.63,5592.96 4612.5,5587.84 D172.1@4612.5,5545
XSIG180235: D172.2 D403.2 R1429.2 R1617.2 TP1108.1 U137.7 | length 823.8
  Top Layer w10: U137.7@4615,5370 4616.99,5370 4616.99,5421.99 4651.64,5456.64 v1(4708.84,5456.64) 4708.84,5424.77 4733.61,5400 R1617.2@4760,5400 4790,5370 D403.2@4835,5370
  Bottom Layer w10: D172.2@4687.5,5541.5 4687.5,5499.41 4700.26,5486.65 4708.84,5486.65 v1(4708.84,5456.64) 4726.31,5439.16 4798.85,5439.16 4815.71,5456.02 4815.71,5481.44 4836.2,5501.93 4861.62,5501.93 4870,5510.31 R1429.2@4870,5555 4876.04,5548.96 4938.59,5548.96 4965.92,5521.62 4965.92,5513.57 4965,5512.64 TP1108.1@4965,5505
XSIG180247: D136.3 R1277.2 R1618.1 R3001.1 TP1109.1 U137.3 U137.6 | length 1112.5
  Top Layer w10: U137.6@4565,5370 4565,5328.24 4556.76,5320 4497.29,5320 4488.5,5328.79 4488.5,5444.36 4565,5520.86 U137.3@4565,5570 4565,5655.54 4579.46,5670 R1618.1@4602.78,5670 ; R1618.1@4610,5670 R1618.1@4602.78,5670 ; R1277.2@4770,6000 4770,5948.68 4756.86,5935.55 4729.24,5935.55 v1(4729.24,5932.65) 4720.94,5932.65 4585,5796.71 R3001.1@4585,5780 4585,5744.74 4602.78,5726.96 R1618.1@4602.78,5670
  Bottom Layer w10: TP1109.1@4655,5930 4720,5930 v1@4720,5932.65 ; D136.3@4720,5998.5 v1@4720,5932.65 ; v1(4729.24,5932.65) v1@4720,5932.65
XSIG180264: R1262.2 R1619.1 R3005.1 TP1116.1 U135.5 | length 431.1
  Top Layer w10: U135.5@4515,4660 4515,4610 4530,4595 R1619.1@4530,4570 4495.67,4570 4479.44,4553.77 v1(4479.44,4521.58) 4512.52,4521.58 4520,4514.1 R1262.2@4520,4480
  Bottom Layer w10: v1(4479.44,4521.58) 4465.42,4507.56 4465.42,4447.36 4462.36,4447.36 TP1116.1@4460,4445 4520,4445 R3005.1@4535,4430
XSIG180269: D173.1 D404.2 R1432.1 R1620.2 TP1117.1 U135.1 | length 541.5
  Top Layer w10: v1(4579.98,4785.22) 4579.98,4792.91 4656.71,4792.91 4665,4801.2 U135.1@4665,4860 4665,4915 ; R1620.2@4650,4950 4650,4927.85 4662.85,4915 4665,4915 ; R1432.1@4760,4915 4665,4915
  Bottom Layer w10: TP1117.1@4520,4710 4521.5,4711.5 D173.1@4579.98,4711.5 ; D173.1@4582.5,4711.5 D173.1@4579.98,4711.5 ; D404.2@4610,4830 4579.98,4799.98 v1(4579.98,4785.22) D173.1@4579.98,4711.5
XSIG180270: D173.2 D405.2 R1619.2 R2499.2 TP1118.1 U135.7 | length 735.6
  Top Layer w10: R1619.2@4610,4570 4615,4570 U135.7@4615,4660 4615,4710 4672.45,4767.45 v1(4679.46,4767.45)
  Bottom Layer w10: D405.2@4480,4660 4580.46,4660 4590.57,4670.11 4641.46,4670.11 4657.5,4686.15 D173.2@4657.5,4711.5 ; v1(4679.46,4767.45) 4657.5,4745.49 D173.2@4657.5,4711.5 ; TP1118.1@4860,4685 4859.04,4685.96 4858.08,4685 R2499.2@4760,4685 4760,4678.37 4725.25,4678.37 4692.12,4711.5 D173.2@4657.5,4711.5
XSIG180284: D137.3 R1278.2 R1620.1 R3002.1 TP102.1 U135.3 U135.6 | length 744
  Top Layer w10: v1(4535.79,4993.74) 4537.1,4992.43 4537.1,4985.4 4570,4952.5 R1620.1@4570,4950 4570,4915 4565,4910 U135.3@4565,4860 4563.43,4860 4563.43,4811.1 4549.98,4797.64 4549.98,4772.79 4565,4757.77 U135.6@4565,4660
  Bottom Layer w10: D137.3@4390,5068.5 4391.5,5070 D137.3@4395.59,5070 ; TP102.1@4395,4995 4395.59,4995.59 D137.3@4395.59,5070 ; R3002.1@4530,4910 4530,4987.94 v1(4535.79,4993.74) 4535.79,5023.74 4531.09,5028.44 4531.09,5029.74 4530,5030.83 R1278.2@4530,5070 D137.3@4395.59,5070
XSIG180299: C1054.2 R2298.1 R2299.2 TP1122.1 U87.5 | length 592.9
  Top Layer w10: U87.5@4515,6390 4515,6440 4525,6450 v1(4568.98,6450) 4685.72,6450 4708.99,6426.73 4708.99,6372.54 4731.53,6350 R2299.2@4770,6350
  Bottom Layer w10: TP1122.1@4375,6430 C1054.2@4450,6430 4471.4,6430 4501.4,6460 R2298.1@4520,6460 4558.98,6460 v1(4568.98,6450)
XSIG180310: C1048.1 C1057.2 D331.3 R2300.2 R2301.2 R2372.1 TP1123.1 U87.2 | length 909.8
  Top Layer w10: v1(4539.15,6670) 4544.15,6665 C1048.1@4610,6665 ; R2301.2@4560,6730 R2300.2@4630,6730 ; U87.2@4615,6590 4615,6660 C1048.1@4610,6665 ; R2372.1@4770,6590 4770,6683.91 4732.9,6721.01 4638.99,6721.01 R2300.2@4630,6730 ; C1048.1@4610,6665 4610,6710 R2300.2@4630,6730
  Bottom Layer w10: C1057.2@4450,6590 4486.93,6590 4517.99,6621.06 4517.99,6648.84 v1(4539.15,6670) 4539.15,6661.5 D331.3@4610,6661.5 4734.86,6661.5 4748.36,6675 TP1123.1@4750,6675
XSIG180315: R2376.2 TP1124.1 U87.3 | length 329.5
  Top Layer w10: R2376.2@4450,6430 4451,6430 4523.61,6502.61 4523.61,6506.12 v1(4544.83,6527.34) 4552.34,6527.34 4565,6540 U87.3@4565,6590
  Bottom Layer w10: v1(4544.83,6527.34) 4589.68,6482.49 4632.51,6482.49 TP1124.1@4640,6475
XSIG180327: C1055.2 R2294.1 R2295.2 TP1125.1 U89.5 | length 421.3
  Top Layer w10: v1(4048.69,5265.03) 4040,5273.72 R2295.2@4040,5330 4115,5330 ; U89.5@4115,5370 4115,5330 ; C1055.2@4170,5290 4127.22,5290 4115,5302.22 4115,5330
  Bottom Layer w10: R2294.1@4040,5340 4039.68,5340 4039.68,5304.68 ; v1(4048.69,5265.03) 4048.28,5265.03 4048.28,5296.08 4039.68,5304.68 ; TP1125.1@4110,5305 4110,5304.68 4039.68,5304.68
XSIG180338: C1047.1 C1056.2 D336.3 R2296.2 R2297.2 R2373.1 TP1126.1 U89.2 | length 1770
  Top Layer w10: v1(4140.97,5709.42) v1@4140.97,5712.46 ; R2373.1@4200,5850 4176.39,5826.39 4141.16,5826.39 ; U89.2@4215,5570 4215,5614 4200,5629 C1047.1@4200,5660 4200,5685.61 4173.15,5712.46 v1@4140.97,5712.46 ; R2296.2@4220,6730 R2297.2@4140,6730 4140,6725 4001.54,6725 3970.21,6693.67 3970.21,5907.24 4037.45,5840 C1056.2@4040,5840 4053.61,5826.39 4141.16,5826.39 ; v1@4140.97,5712.46 4140.97,5826.2 4141.16,5826.39
  Bottom Layer w10: v1(4140.97,5709.42) 4150.92,5709.42 D336.3@4190,5748.5 TP1126.1@4190,5680
XSIG180342: R2374.2 TP1127.1 U89.3 | length 264.3
  Top Layer w10: R2374.2@4040,5540 4075.92,5540 4110.48,5505.44 v1(4158.19,5505.44) 4165,5512.25 U89.3@4165,5570
  Bottom Layer w10: v1(4158.19,5505.44) 4170,5517.25 TP1127.1@4170,5565
XSIG180358: C811.1 R1776.1 R2056.2 TP1115.1 U135.2 | length 401.3
  Top Layer w10: R2056.2@4570,5040 4571,5040 4596.61,5014.39 4607.21,5014.39 v1@4612.79,5019.97 ; U135.2@4615,4860 4615,4987.76 4612.79,4989.97 v1@4612.79,5019.97 ; v1(4615,5025) 4612.79,5025 v1@4612.79,5019.97 ; R1776.1@4760,5040 4760,5042.62 4724.62,5042.62 4717,5035 C811.1@4670,5035 4627.82,5035 v1@4612.79,5019.97
  Bottom Layer w10: TP1115.1@4605,5012.18 4612.79,5019.97 4612.79,5025 v1(4615,5025)
XSIG180365: C511.1 R1195.2 R1278.1 R1696.2 TP1114.1 | length 354.7
  Bottom Layer w10: TP1114.1@4440,5230 4448.98,5221.02 4530,5221.02 R1195.2@4530,5220 ; R1278.1@4530,5150 R1195.2@4530,5220 ; C511.1@4710,5230 4710,5220 R1696.2@4640,5220 R1195.2@4530,5220
XSIG180366: C808.1 R1262.1 R1779.1 R1814.2 TP103.1 | length 752.3
  Top Layer w10: R1262.1@4520,4400 4552.57,4400 4567.57,4415 C808.1@4610,4415 4610,4414.94 4640.06,4414.94 4668.41,4386.59 ; v1(4659,4370.34) 4668.41,4370.34 4668.41,4386.59 ; R1779.1@4700,4390 4700,4388.52 4668.41,4388.52 4668.41,4386.59
  Bottom Layer w10: v1(4659,4370.34) 4725.94,4370.34 4880,4524.4 TP103.1@4880,4595 4880,4596.35 4957.12,4673.47 5010,4673.47 R1814.2@5010,4680
XSIG180371: C807.1 R1257.1 R1778.1 R1813.2 TP1106.1 | length 1495.4
  Top Layer w10: R1257.1@4760,5670 4807.34,5670 4827.85,5690.52 v1(4827.85,5693.61) 4830.85,5693.61 4841.16,5683.31 4847.13,5683.31 4872.48,5657.95 4872.48,5292.8 4825,5245.32 4825,5002.22 4867.08,4960.14 4867.08,4805.8 v1(4876.88,4796)
  Bottom Layer w10: R1778.1@4700,5740 4731,5740 4736,5735 C807.1@4780,5735 4815.03,5735 4827.85,5722.18 v1(4827.85,5693.61) ; v1(4876.88,4796) 4930,4796 ; TP1106.1@4930,4765 4930,4796 ; R1813.2@5100,4750 5100,4778.17 5082.17,4796 4930,4796
XSIG180378: C510.1 R1194.2 R1277.1 R1695.2 TP1103.1 | length 793.3
  Top Layer w10: C510.1@4620,6300 4598.46,6300 4585.69,6287.22 4585.69,6008.45 4594.14,6000 R1695.2@4650,6000 4699.72,6000 4717.22,6017.5 4717.22,6061.27 4735.95,6080 R1277.1@4770,6080 R1194.2@4770,6180 4731.62,6180 v1(4715.17,6163.55)
  Bottom Layer w10: v1(4715.17,6163.55) 4731.62,6180 TP1103.1@4775,6180
XSIG180383: C810.1 R1775.1 R2055.2 TP1104.1 U137.2 | length 600.7
  Top Layer w10: U137.2@4615,5570 4615,5620 4627.5,5632.5 4636.21,5632.5 4654.99,5651.28 v1(4654.99,5720.69)
  Bottom Layer w10: R2055.2@4520,5680 R1775.1@4520,5750 4525,5745 C810.1@4590,5745 4633.78,5745 ; TP1104.1@4555,5900 4592.22,5900 4633.78,5858.44 4633.78,5745 ; v1(4654.99,5720.69) 4633.78,5741.91 4633.78,5745
XSIG180387: D404.1 R3002.2 TP1915.1 | length 212.9
  Bottom Layer w10: R3002.2@4530,4850 4563.79,4850 4610,4896.21 D404.1@4610,4920 TP1915.1@4700,4920
XSIG180390: D402.1 R3001.2 TP1916.1 | length 238.6
  Top Layer w10: R3001.2@4645,5780 D402.1@4720,5780 4740.79,5800.79 v1(4740.79,5882.86)
  Bottom Layer w10: v1(4740.79,5882.86) 4782.86,5882.86 TP1916.1@4790,5890
XSIG180393: D405.1 R3005.2 TP1917.1 | length 294.1
  Bottom Layer w10: TP1917.1@4410,4695 4430.01,4674.99 4430.01,4595.14 4455.15,4570 D405.1@4480,4570 4518.95,4570 4535,4553.95 R3005.2@4535,4490
XSIG180396: D403.1 R3004.2 TP1918.1 | length 184.7
  Top Layer w10: v1(4807.93,5524.75) 4825.14,5524.75 ; R3004.2@4825,5570 4825.14,5569.86 4825.14,5524.75 ; D403.1@4835,5460 4835,5513.09 4825.14,5522.95 4825.14,5524.75
  Bottom Layer w10: TP1918.1@4775,5485 4775,5491.82 v1(4807.93,5524.75)
XSIG190051: C1088.2 D158.3 R2243.2 R2592.1 TP1128.1 U204.3 | length 528.1
  Top Layer w10: R2592.1@7460,7610 7460,7594.04 7494.33,7559.7 7592.29,7559.7 7605,7572.42 U204.3@7605,7610 7605,7660 v1(7640,7695)
  Bottom Layer w10: v1(7640,7695) 7645,7700 C1088.2@7710,7700 ; D158.3@7710,7631.5 C1088.2@7710,7700 ; R2243.2@7780,7700 C1088.2@7710,7700
XSIG190054: R2258.2 R2259.1 TP1129.1 U204.1 | length 384.2
  Top Layer w10: v1(7661.1,7480.34) 7657.66,7480.34 7655.03,7482.97 7705,7532.94 7705,7560 ; R2258.2@7710,7700 7710,7670 7705,7665 U204.1@7705,7610 7705,7560 ; R2259.1@7780,7560 7705,7560
  Bottom Layer w10: TP1129.1@7650,7430 7650,7477.94 7655.03,7482.97 7658.47,7482.97 v1(7661.1,7480.34)
XSIG190107: C802.1 R1214.2 R1246.1 R1676.2 TP1130.1 | length 456.3
  Top Layer w10: R1214.2@6440,4860 6477.5,4860 6490.08,4872.58 6490.08,4908.47 6511.61,4930 C802.1@6548.27,4930 ; R1246.1@6520,5040 6520,4991.27 v1(6523.79,4987.48) 6548.27,4963 C802.1@6548.27,4930 ; R1676.2@6660,4940 6608.16,4940 6598.16,4930 C802.1@6550,4930 C802.1@6548.27,4930
  Bottom Layer w10: v1(6523.79,4987.48) 6523.79,4971.21 TP1130.1@6555,4940
XSIG190109: R1246.2 R1655.1 TP1131.1 U132.5 | length 437.4
  Top Layer w10: v1(6519.44,5430.01) 6515,5425.58 U132.5@6515,5370 6515,5320 6530,5305 R1655.1@6530,5280 6490.47,5280 6483.4,5272.93 6483.4,5172.07 6490.47,5165 6510,5165 6520,5155 R1246.2@6520,5120
  Bottom Layer w10: v1(6519.44,5430.01) 6520,5429.45 TP1131.1@6520,5380
XSIG190111: C803.1 R1215.2 R1247.1 R1677.2 TP1132.1 | length 424
  Top Layer w10: C803.1@6470,6020 6521.75,6020 6531.75,6010 R1677.2@6590,6010 R1247.1@6590,5930 6644.31,5930 v1(6650.93,5936.61) 6680,5965.69 R1215.2@6680,6010
  Bottom Layer w10: TP1132.1@6585,5925 6639.31,5925 v1(6650.93,5936.61)
XSIG190113: R1247.2 R1656.1 TP1133.1 U132.3 | length 463
  Top Layer w10: U132.3@6565,5570 6571.82,5576.82 6571.82,5650 R1656.1@6580,5650 6580,5674.83 6549.39,5705.44 6549.39,5840.08 6559.31,5850 R1247.2@6590,5850 6629.28,5850 v1(6645.14,5865.86)
  Bottom Layer w10: v1(6645.14,5865.86) 6664.28,5885 TP1133.1@6700,5885
XSIG190116: D299.3 R1440.1 R1656.2 TP1134.1 U132.1 | length 378.6
  Top Layer w10: R1656.2@6660,5650 6665,5645 R1656.2@6665,5642.89 ; U132.1@6665,5570 R1656.2@6665,5642.89 ; v1(6701.82,5612.84) 6701.82,5632.74 6691.67,5642.89 R1656.2@6665,5642.89
  Bottom Layer w10: D299.3@6660,5451.5 6665,5451.5 R1440.1@6665,5550 6665,5613.16 ; TP1134.1@6665,5645 6665,5613.16 ; v1(6701.82,5612.84) 6701.82,5613.16 6665,5613.16
XSIG190117: D300.3 R1439.1 R1655.2 TP1135.1 U132.7 | length 578.1
  Top Layer w10: R1655.2@6530,5200 6582.3,5200 6582.3,5196.1 ; 6601.83,5135.77 v1(6582.3,5135.77) 6582.3,5196.1 ; 6601.84,5135.79 6602.63,5135 R1439.1@6660,5135 ; U132.7@6615,5370 6615,5228.8 6582.3,5196.1
  Bottom Layer w10: TP1135.1@6470,5185 6596.5,5185 D300.3@6600,5188.5 6600,5145.59 6590.18,5135.77 v1(6582.3,5135.77)
XSIG190202: R2258.1 R2329.1 TP1617.1 U204.2 | length 413.2
  Top Layer w10: v1(7654.35,7798.33) 7701.31,7798.33 7709,7790.64 R2258.1@7709,7760 ; U204.2@7655,7610 7655,7667.57 7674.5,7687.07 7674.5,7743.41 7691.09,7760 R2258.1@7709,7760 ; R2329.1@7780,7750 7751,7750 7741,7760 R2258.1@7710,7760 R2258.1@7709,7760
  Bottom Layer w10: TP1617.1@7630,7855 7654.35,7830.65 v1(7654.35,7798.33)
XSIG190215: D379.1 TP1136.1 U76.1 U76.2 | length 305.9
  Top Layer w10: U76.2@7655,6590 v1@7655,6646.98 ; v1(7662.54,6655.71) 7655,6648.17 v1@7655,6646.98 ; U76.1@7705,6590 7705,6631.28 7689.3,6646.98 v1@7655,6646.98
  Bottom Layer w10: TP1136.1@7580,6640 7646.83,6640 ; D379.1@7642.5,6591.5 7642.5,6635.67 7646.83,6640 ; v1(7662.54,6655.71) 7646.83,6640
XSIG190216: R2259.2 R2393.2 TP1137.1 U76.3 | length 1236.7
  Top Layer w10: v1(7594.57,6522.82) 7605,6533.26 U76.3@7605,6590 7605,6640.6 7661.01,6696.6 7711.32,6696.6 7758.95,6744.24 7758.95,7342.04 7786.03,7369.12 7786.03,7500 R2259.2@7780,7500
  Bottom Layer w10: R2393.2@7480,6570 7481.88,6568.12 7545,6568.12 TP1137.1@7545,6550 7572.18,6522.82 v1(7594.57,6522.82)
XSIG190233: C1089.2 D328.3 R2242.2 R2593.1 TP1138.1 U205.3 | length 778
  Top Layer w10: R2593.1@7110,7610 7136.9,7610 7201.01,7545.89 7235.7,7545.89 7255,7565.19 U205.3@7255,7610 7255,7660 7262.26,7667.26 7264.44,7667.26 v1(7285.65,7688.48)
  Bottom Layer w10: TP1138.1@7255,7845 7301.25,7798.75 7355.96,7798.75 7371,7783.71 7371,7732.5 7340,7701.5 C1089.2@7340,7700 ; v1(7285.65,7688.48) 7297.17,7700 C1089.2@7340,7700 ; D328.3@7350,7621.5 7350,7660 7347.5,7660 7340,7667.5 C1089.2@7340,7700 ; R2242.2@7420,7700 C1089.2@7340,7700
XSIG190235: R2256.1 R2257.2 TP1139.1 U205.1 | length 549.5
  Top Layer w10: R2257.2@7350,7700 7350,7699.35 7355,7694.35 U205.1@7355,7610 7355,7563.53 7421.25,7497.28 7421.25,7422.42 ; v1(7397.7,7422.42) 7421.25,7422.42 ; R2256.1@7450,7270 7449,7270 7421.25,7297.75 7421.25,7422.42
  Bottom Layer w10: TP1139.1@7370,7380 7397.7,7407.7 v1(7397.7,7422.42)
XSIG190242: R2257.1 R2328.1 TP1140.1 U205.2 | length 391.9
  Top Layer w10: U205.2@7305,7610 7305,7665.4 7317.32,7677.72 7317.32,7746.53 7330.79,7760 R2257.1@7350,7760 7350,7763.57 7420,7763.57 R2328.1@7420,7770 7420,7809.34 v1(7389.34,7840)
  Bottom Layer w10: TP1140.1@7340,7840 v1(7389.34,7840)
XSIG190247: D380.1 TP1141.1 U66.1 U66.2 | length 325.7
  Top Layer w10: U66.2@7305,6590 7305,6634.61 7328.05,6657.66 7355,6657.66 v1@7355,6648.38 ; v1(7350.76,6652.62) v1@7355,6648.38 ; U66.1@7355,6590 v1@7355,6648.38
  Bottom Layer w10: D380.1@7282.5,6601.5 7282.5,6640 7300,6657.5 TP1141.1@7300,6680 7327.38,6652.62 v1(7350.76,6652.62)
XSIG190249: R2256.2 R2392.2 TP1142.1 U66.3 | length 925.2
  Top Layer w10: U66.3@7255,6590 7255,6670.79 v1(7252.04,6673.75) 7315.86,6673.75 7327.95,6685.84 7380.56,6685.84 7411,6716.29 7411,6858.66 7388.6,6881.06 7388.6,7149.6 7449,7210 R2256.2@7450,7210
  Bottom Layer w10: R2392.2@7200,6600 TP1142.1@7200,6680 7245.79,6680 v1(7252.04,6673.75)
XSIG190261: C1090.2 D329.3 R2241.2 R2594.1 TP1143.1 U206.3 | length 665.5
  Top Layer w10: R2594.1@6760,7610 6797.73,7610 6806.52,7601.22 6806.52,7574.4 6827.04,7553.88 6896.38,7553.88 6905,7562.5 U206.3@6905,7610 6902.97,7610 6902.97,7656.4 v1(6878.9,7680.46)
  Bottom Layer w10: v1(6878.9,7680.46) 6884.82,7680.46 6933.05,7632.24 D329.3@6980,7632.24 ; D329.3@6980,7631.5 D329.3@6980,7632.24 ; TP1143.1@7095,7640 7087.97,7640 7087.97,7671.67 7059.65,7700 C1090.2@7040,7700 R2241.2@6980,7700 D329.3@6980,7632.24
XSIG190263: R2252.1 R2253.2 TP1618.1 U206.1 | length 601.9
  Top Layer w10: R2253.2@6940,7700 6966.29,7700 7005,7661.29 U206.1@7005,7610 7005,7575.08 7068.12,7511.96 v1@7068.12,7316.49 ; v1(7065.66,7316.49) v1@7068.12,7316.49 ; R2252.1@7090,7270 7090,7296.37 7069.88,7316.49 v1@7068.12,7316.49
  Bottom Layer w10: v1(7065.66,7316.49) 7065.66,7230 TP1618.1@7070,7230
XSIG190270: R2253.1 R2327.1 TP1145.1 U206.2 | length 449.6
  Top Layer w10: U206.2@6955,7610 6955,7648.9 6943.9,7660 6927.79,7660 6909,7678.79 6909,7730 6939,7760 R2253.1@6940,7760 7028.4,7760 7038.4,7770 R2327.1@7040,7770 7040,7829.48 7060.52,7850 v1(7077.8,7850)
  Bottom Layer w10: TP1145.1@7030,7850 v1(7077.8,7850)
XSIG190275: D381.1 TP1146.1 U68.1 U68.2 | length 325
  Top Layer w10: U68.2@6955,6590 6955,6648.28 v1(6957.97,6651.25) 6957.97,6652.36 6990.9,6652.36 7005,6638.25 U68.1@7005,6590
  Bottom Layer w10: D381.1@6932.5,6601.5 6947.5,6601.5 6947.5,6640.78 v1(6957.97,6651.25) 6957.97,6681.64 6940,6699.61 TP1146.1@6940,6735
XSIG190277: R2252.2 R2391.2 TP1147.1 U68.3 | length 917.4
  Top Layer w10: U68.3@6905,6590 6905,6640 6903.11,6641.89 6903.11,6663.11 v1(6906.34,6666.34) 6947.5,6707.5 7052.21,6707.5 7066.64,6721.93 7066.64,6915.21 7059,6922.86 7059,7180 7089,7210 R2252.2@7090,7210
  Bottom Layer w10: R2391.2@6840,6600 6840,6653.58 TP1147.1@6860,6673.58 ; TP1147.1@6860,6670 TP1147.1@6860,6673.58 ; v1(6906.34,6666.34) 6890.84,6666.34 6872.18,6685 6860,6685 TP1147.1@6860,6673.58
XSIG190293: C1064.1 D381.3 R2409.1 TP1148.1 U68.5 | length 506.9
  Top Layer w10: v1(6899.29,6493.51) 6855,6449.23 U68.5@6855,6390 6855,6340 6866.61,6328.39 6866.61,6318.11 6840,6291.5 C1064.1@6840,6290 R2409.1@6930,6290
  Bottom Layer w10: v1(6899.29,6493.51) 6904.6,6493.51 6928.64,6517.55 D381.3@6970,6517.55 ; TP1148.1@6970,6420 D381.3@6970,6517.55 ; D381.3@6970,6518.5 D381.3@6970,6517.55
XSIG190299: C1063.1 D380.3 R2399.1 TP1149.1 U66.5 | length 492
  Top Layer w10: C1063.1@7150,6290 7205.9,6290 ; R2399.1@7240,6290 7205.9,6290 ; v1(7259.02,6495.45) 7205,6441.43 U66.5@7205,6390 7205.9,6390 7205.9,6290
  Bottom Layer w10: v1(7259.02,6495.45) 7282.07,6518.5 D380.3@7320,6518.5 7320,6514.82 7370.18,6514.82 7380,6505 TP1149.1@7415,6505
XSIG190305: C1062.1 D379.3 R2398.1 TP65.1 U76.5 | length 455.5
  Top Layer w10: R2398.1@7460,6290 C1062.1@7570,6290 7570,6291.5 7558.6,6302.9 7558.6,6390 U76.5@7555,6390 7555,6448.68 7561.73,6455.4 v1(7561.73,6485.4)
  Bottom Layer w10: v1(7561.73,6485.4) 7572.13,6475 TP65.1@7610,6475 7645,6475 7645.61,6474.39 7649.39,6474.39 7680,6505 D379.3@7680,6508.5
XSIG200001: C790.1 R1176.2 R1248.1 R1678.2 TP1150.1 | length 348.6
  Top Layer w10: R1248.1@5860,5200 R1678.2@5860,5120 5860,5105 5900.46,5105 v1(5921.88,5083.58) 5931.47,5083.58 5947.88,5100 C790.1@5980,5100
  Bottom Layer w10: TP1150.1@5865,5080 5918.29,5080 v1(5921.88,5083.58) 5925.46,5080 R1176.2@5980,5080
XSIG200009: R1248.2 R1623.1 TP1151.1 U133.5 | length 373.9
  Top Layer w10: v1(5855,5432.7) 5865,5422.7 U133.5@5865,5370 5865,5320 5860,5315 R1248.2@5860,5280 5862.5,5280 5942.5,5200 R1623.1@5980,5200
  Bottom Layer w10: v1(5855,5432.7) 5865,5422.7 TP1151.1@5865,5375
XSIG200010: C791.1 R1177.2 R1249.1 R1679.2 TP1152.1 | length 372.4
  Top Layer w10: v1(5855,5725) 5858.9,5725 5858.9,5726.4 5872.5,5740 R1249.1@5910,5740
  Bottom Layer w10: R1679.2@5760,5800 5800.64,5800 5810.64,5810 C791.1@5840,5810 ; v1(5855,5725) 5855,5724.41 5858.9,5724.41 5840,5743.31 C791.1@5840,5810 ; R1177.2@5960,5790 5901.67,5790 5881.67,5810 C791.1@5840,5810
XSIG200016: R1249.2 R1624.1 TP1153.1 U133.3 | length 353.9
  Top Layer w10: U133.3@5915,5570 5915,5620 5910,5625 R1249.2@5910,5660 5946.2,5660 5959.39,5673.19 v1(5959.39,5709.39) 5959.39,5725.91 5973.48,5740 R1624.1@6010,5740
  Bottom Layer w10: TP1153.1@5915,5630 5915,5665 v1(5959.39,5709.39)
XSIG200131: C792.1 R1181.2 R1250.1 R1680.2 TP1154.1 | length 433.5
  Top Layer w10: v1(7206.52,4997.24) 7206.52,5016.1 7192.63,5030 R1181.2@7160,5030 R1250.1@7160,4940 7211.25,4940 7221.25,4930 C792.1@7270,4930 R1680.2@7270,5030
  Bottom Layer w10: TP1154.1@7180,4950 7206.52,4976.52 v1(7206.52,4997.24)
XSIG200133: R1250.2 R1650.1 TP1155.1 U128.3 | length 355
  Top Layer w10: R1250.2@7160,4860 7160,4861.25 7190.49,4861.25 7207.62,4844.13 v1(7207.62,4830.46) 7228.83,4809.24 7247.47,4809.24 7270,4786.72 R1650.1@7270,4730 7270,4705 7255,4690 U128.3@7255,4640
  Bottom Layer w10: TP1155.1@7170,4865 7204.54,4830.46 v1(7207.62,4830.46)
XSIG200136: C793.1 R1182.2 R1251.1 R1681.2 TP1619.1 | length 397.2
  Bottom Layer w10: R1182.2@7000,4420 7002.5,4420 7046.89,4464.39 7046.89,4469.39 7077.5,4500 R1251.1@7080,4500 7080,4565.3 7086.08,4571.39 ; TP1619.1@7070,4585 7072.61,4585 7080,4577.61 7080,4577.47 7086.08,4571.39 ; C793.1@7180,4580 C793.1@7180,4575 ; R1681.2@7260,4570 7260,4575 C793.1@7180,4575 ; 7086.08,4571.39 7173.89,4571.39 7177.5,4575 C793.1@7180,4575
XSIG200138: R1251.2 R1651.1 TP1620.1 U128.5 | length 370.9
  Top Layer w10: v1(7174.97,4374.17) 7174.97,4375.56 7187.51,4375.56 7205,4393.05 U128.5@7205,4440
  Bottom Layer w10: TP1620.1@7020,4335 7030,4335 7030,4385.71 7064.29,4420 R1251.2@7080,4420 R1651.1@7185.8,4420 ; v1(7174.97,4374.17) 7185.8,4385 R1651.1@7185.8,4420 ; R1651.1@7190,4420 R1651.1@7185.8,4420
XSIG200168: D308.3 R1441.1 R1623.2 TP1158.1 U133.7 | length 466
  Top Layer w10: v1(5910.76,5289.43) 5920.19,5280 R1623.2@5980,5280 5980,5305 5965,5320 U133.7@5965,5370
  Bottom Layer w10: TP1158.1@5720,5310 5785,5310 D308.3@5820,5275 ; D308.3@5820,5271.5 D308.3@5820,5275 ; R1441.1@5980,5275 5925.19,5275 v1(5910.76,5289.43) 5910.76,5278.06 5823.06,5278.06 D308.3@5820,5275
XSIG200169: D307.3 R1442.1 R1624.2 TP1159.1 U133.1 | length 388.3
  Top Layer w10: R1624.2@6010,5660 6010,5625 6015,5620 U133.1@6015,5570 6015,5517.86 6011,5513.86 v1(6011,5509.81)
  Bottom Layer w10: v1(6011,5509.81) 6011.19,5510 6075,5510 ; D307.3@6070,5628.5 6070,5546.92 6071.92,5545 TP1159.1@6075,5545 6075,5510 ; R1442.1@6080,5465 6080,5506.54 6076.54,5510 6075,5510
XSIG200172: D298.3 R1444.1 R1651.2 TP1621.1 U128.7 | length 519.6
  Top Layer w10: U128.7@7305,4440 7305,4534.43 v1(7310.01,4534.43)
  Bottom Layer w10: R1651.2@7190,4500 7220.57,4500 7245.57,4475 R1444.1@7290,4475 7290.11,4475 7290.11,4512.69 7310.01,4532.58 v1(7310.01,4534.43) 7352.35,4534.43 7383.19,4565.27 7410,4565.27 D298.3@7410,4571.5 7410,4621.99 7445,4656.99 TP1621.1@7445,4680
XSIG200174: D309.3 R1443.1 R1650.2 TP64.1 U128.1 | length 1493.7
  Top Layer w10: R1443.1@7360,4925 7367.83,4925 7367.83,4852.19 7350,4834.36 R1650.2@7350,4730 7355,4730 U128.1@7355,4640 7355,4619.71 7463.89,4510.82 7463.89,4379.82 7497.92,4345.79 v1(7497.92,4282.94)
  Bottom Layer w10: v1(7497.92,4282.94) 7497.92,4278.48 7698.48,4278.48 7714.82,4294.82 8095,4294.82 ; TP64.1@8095,4325 8095,4294.82 ; D309.3@8218.5,4270 8180,4270 8155.18,4294.82 8095,4294.82